# EAGLE board Iso_Spacer-Panel (EAGLE 9.5.2)
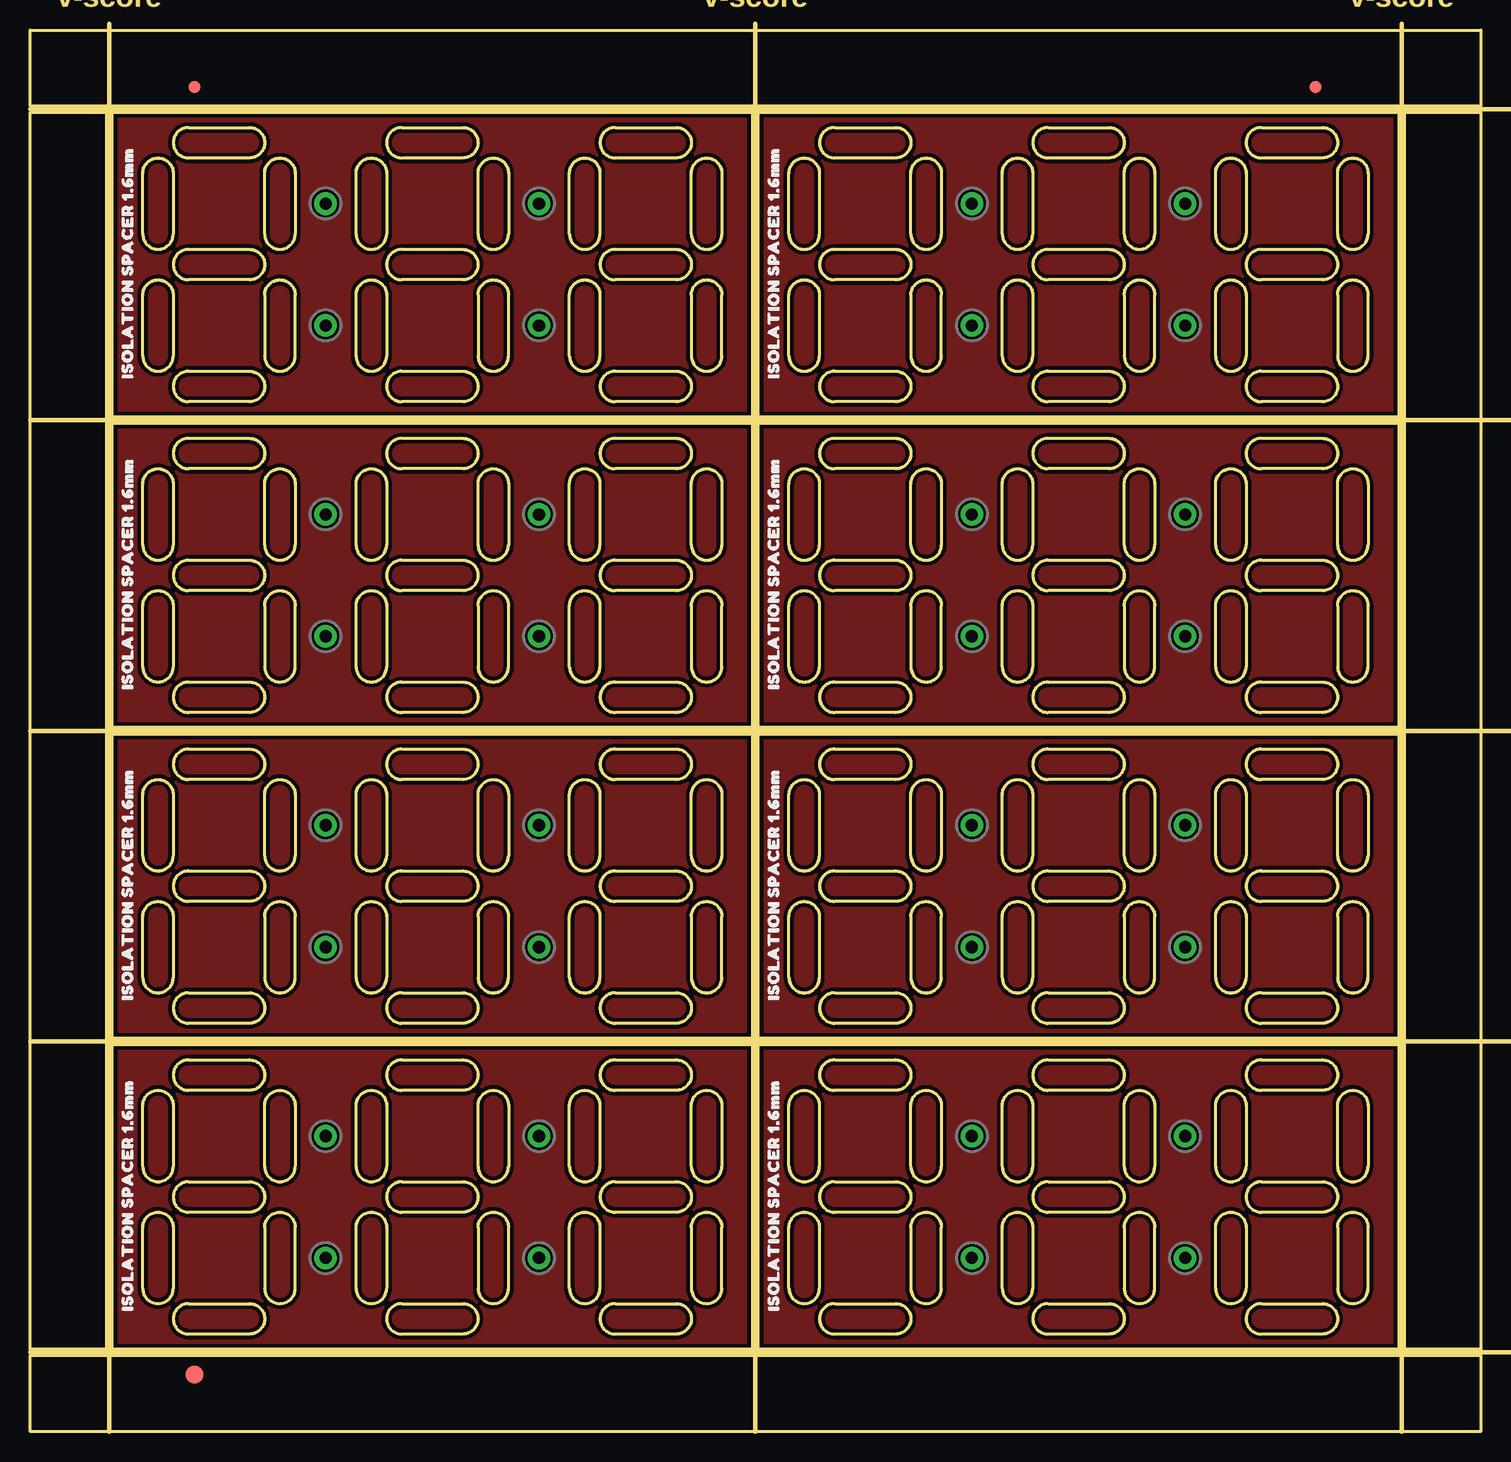
[diagram p0: board, top side]
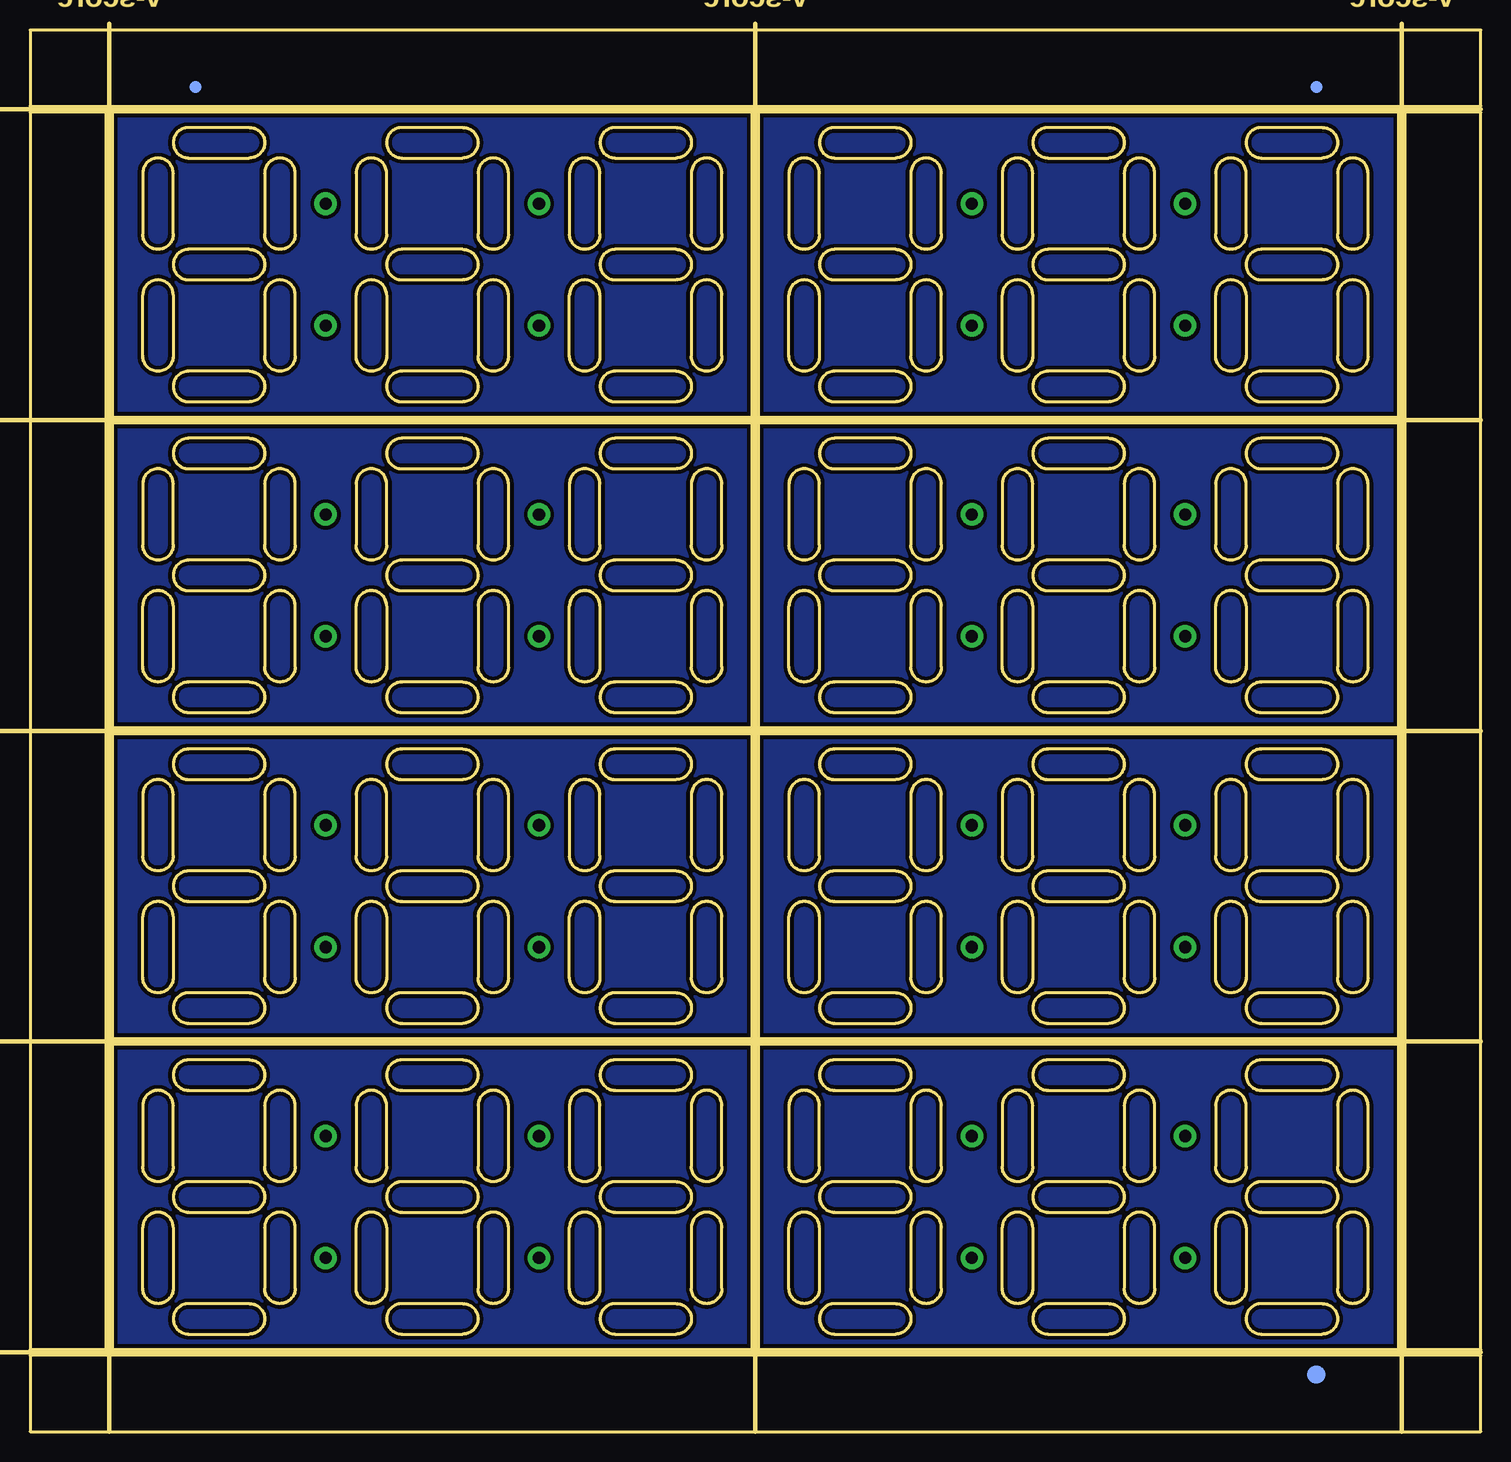
[diagram p1: board, bottom side, seen from below]

Size 120.9 x 116.84 mm. Coordinates in mm from the lower left corner, seen from the top.
Outline: 6.86,32.26 60.2,32.26 60.2,6.86 6.86,6.86 6.86,32.26
Outline: 13.21,30.99 18.29,30.99 arc-180 18.29,28.45 13.21,28.45 arc-180 13.21,30.99
Outline: 11.94,27.18 11.94,22.1 arc-180 9.4,22.1 9.4,27.18 arc-180 11.94,27.18
Outline: 22.1,27.18 22.1,22.1 arc-180 19.56,22.1 19.56,27.18 arc-180 22.1,27.18
Outline: 13.21,20.83 18.29,20.83 arc-180 18.29,18.29 13.21,18.29 arc-180 13.21,20.83
Outline: 11.94,17.02 11.94,11.94 arc-180 9.4,11.94 9.4,17.02 arc-180 11.94,17.02
Outline: 19.56,17.02 19.56,11.94 arc180 22.1,11.94 22.1,17.02 arc180 19.56,17.02
Outline: 13.21,10.67 18.29,10.67 arc-180 18.29,8.13 13.21,8.13 arc-180 13.21,10.67
Outline: 30.99,30.99 36.07,30.99 arc-180 36.07,28.45 30.99,28.45 arc-180 30.99,30.99
Outline: 29.72,27.18 29.72,22.1 arc-180 27.18,22.1 27.18,27.18 arc-180 29.72,27.18
Outline: 39.88,27.18 39.88,22.1 arc-180 37.34,22.1 37.34,27.18 arc-180 39.88,27.18
Outline: 30.99,20.83 36.07,20.83 arc-180 36.07,18.29 30.99,18.29 arc-180 30.99,20.83
Outline: 29.72,17.02 29.72,11.94 arc-180 27.18,11.94 27.18,17.02 arc-180 29.72,17.02
Outline: 37.34,17.02 37.34,11.94 arc180 39.88,11.94 39.88,17.02 arc180 37.34,17.02
Outline: 30.99,10.67 36.07,10.67 arc-180 36.07,8.13 30.99,8.13 arc-180 30.99,10.67
Outline: 48.77,30.99 53.85,30.99 arc-180 53.85,28.45 48.77,28.45 arc-180 48.77,30.99
Outline: 47.5,27.18 47.5,22.1 arc-180 44.96,22.1 44.96,27.18 arc-180 47.5,27.18
Outline: 57.66,27.18 57.66,22.1 arc-180 55.12,22.1 55.12,27.18 arc-180 57.66,27.18
Outline: 48.77,20.83 53.85,20.83 arc-180 53.85,18.29 48.77,18.29 arc-180 48.77,20.83
Outline: 47.5,17.02 47.5,11.94 arc-180 44.96,11.94 44.96,17.02 arc-180 47.5,17.02
Outline: 55.12,17.02 55.12,11.94 arc180 57.66,11.94 57.66,17.02 arc180 55.12,17.02
Outline: 48.77,10.67 53.85,10.67 arc-180 53.85,8.13 48.77,8.13 arc-180 48.77,10.67
Outline: 60.71,32.26 114.05,32.26 114.05,6.86 60.71,6.86 60.71,32.26
Outline: 67.06,30.99 72.14,30.99 arc-180 72.14,28.45 67.06,28.45 arc-180 67.06,30.99
Outline: 65.79,27.18 65.79,22.1 arc-180 63.25,22.1 63.25,27.18 arc-180 65.79,27.18
Outline: 75.95,27.18 75.95,22.1 arc-180 73.41,22.1 73.41,27.18 arc-180 75.95,27.18
Outline: 67.06,20.83 72.14,20.83 arc-180 72.14,18.29 67.06,18.29 arc-180 67.06,20.83
Outline: 65.79,17.02 65.79,11.94 arc-180 63.25,11.94 63.25,17.02 arc-180 65.79,17.02
Outline: 73.41,17.02 73.41,11.94 arc180 75.95,11.94 75.95,17.02 arc180 73.41,17.02
Outline: 67.06,10.67 72.14,10.67 arc-180 72.14,8.13 67.06,8.13 arc-180 67.06,10.67
Outline: 84.84,30.99 89.92,30.99 arc-180 89.92,28.45 84.84,28.45 arc-180 84.84,30.99
Outline: 83.57,27.18 83.57,22.1 arc-180 81.03,22.1 81.03,27.18 arc-180 83.57,27.18
Outline: 93.73,27.18 93.73,22.1 arc-180 91.19,22.1 91.19,27.18 arc-180 93.73,27.18
Outline: 84.84,20.83 89.92,20.83 arc-180 89.92,18.29 84.84,18.29 arc-180 84.84,20.83
Outline: 83.57,17.02 83.57,11.94 arc-180 81.03,11.94 81.03,17.02 arc-180 83.57,17.02
Outline: 91.19,17.02 91.19,11.94 arc180 93.73,11.94 93.73,17.02 arc180 91.19,17.02
Outline: 84.84,10.67 89.92,10.67 arc-180 89.92,8.13 84.84,8.13 arc-180 84.84,10.67
Outline: 102.62,30.99 107.7,30.99 arc-180 107.7,28.45 102.62,28.45 arc-180 102.62,30.99
Outline: 101.35,27.18 101.35,22.1 arc-180 98.81,22.1 98.81,27.18 arc-180 101.35,27.18
Outline: 111.51,27.18 111.51,22.1 arc-180 108.97,22.1 108.97,27.18 arc-180 111.51,27.18
Outline: 102.62,20.83 107.7,20.83 arc-180 107.7,18.29 102.62,18.29 arc-180 102.62,20.83
Outline: 101.35,17.02 101.35,11.94 arc-180 98.81,11.94 98.81,17.02 arc-180 101.35,17.02
Outline: 108.97,17.02 108.97,11.94 arc180 111.51,11.94 111.51,17.02 arc180 108.97,17.02
Outline: 102.62,10.67 107.7,10.67 arc-180 107.7,8.13 102.62,8.13 arc-180 102.62,10.67
Outline: 6.86,58.17 60.2,58.17 60.2,32.77 6.86,32.77 6.86,58.17
Outline: 13.21,56.9 18.29,56.9 arc-180 18.29,54.36 13.21,54.36 arc-180 13.21,56.9
Outline: 11.94,53.09 11.94,48.01 arc-180 9.4,48.01 9.4,53.09 arc-180 11.94,53.09
Outline: 22.1,53.09 22.1,48.01 arc-180 19.56,48.01 19.56,53.09 arc-180 22.1,53.09
Outline: 13.21,46.74 18.29,46.74 arc-180 18.29,44.2 13.21,44.2 arc-180 13.21,46.74
Outline: 11.94,42.93 11.94,37.85 arc-180 9.4,37.85 9.4,42.93 arc-180 11.94,42.93
Outline: 19.56,42.93 19.56,37.85 arc180 22.1,37.85 22.1,42.93 arc180 19.56,42.93
Outline: 13.21,36.58 18.29,36.58 arc-180 18.29,34.04 13.21,34.04 arc-180 13.21,36.58
Outline: 30.99,56.9 36.07,56.9 arc-180 36.07,54.36 30.99,54.36 arc-180 30.99,56.9
Outline: 29.72,53.09 29.72,48.01 arc-180 27.18,48.01 27.18,53.09 arc-180 29.72,53.09
Outline: 39.88,53.09 39.88,48.01 arc-180 37.34,48.01 37.34,53.09 arc-180 39.88,53.09
Outline: 30.99,46.74 36.07,46.74 arc-180 36.07,44.2 30.99,44.2 arc-180 30.99,46.74
Outline: 29.72,42.93 29.72,37.85 arc-180 27.18,37.85 27.18,42.93 arc-180 29.72,42.93
Outline: 37.34,42.93 37.34,37.85 arc180 39.88,37.85 39.88,42.93 arc180 37.34,42.93
Outline: 30.99,36.58 36.07,36.58 arc-180 36.07,34.04 30.99,34.04 arc-180 30.99,36.58
Outline: 48.77,56.9 53.85,56.9 arc-180 53.85,54.36 48.77,54.36 arc-180 48.77,56.9
Outline: 47.5,53.09 47.5,48.01 arc-180 44.96,48.01 44.96,53.09 arc-180 47.5,53.09
Outline: 57.66,53.09 57.66,48.01 arc-180 55.12,48.01 55.12,53.09 arc-180 57.66,53.09
Outline: 48.77,46.74 53.85,46.74 arc-180 53.85,44.2 48.77,44.2 arc-180 48.77,46.74
Outline: 47.5,42.93 47.5,37.85 arc-180 44.96,37.85 44.96,42.93 arc-180 47.5,42.93
Outline: 55.12,42.93 55.12,37.85 arc180 57.66,37.85 57.66,42.93 arc180 55.12,42.93
Outline: 48.77,36.58 53.85,36.58 arc-180 53.85,34.04 48.77,34.04 arc-180 48.77,36.58
Outline: 60.71,58.17 114.05,58.17 114.05,32.77 60.71,32.77 60.71,58.17
Outline: 67.06,56.9 72.14,56.9 arc-180 72.14,54.36 67.06,54.36 arc-180 67.06,56.9
Outline: 65.79,53.09 65.79,48.01 arc-180 63.25,48.01 63.25,53.09 arc-180 65.79,53.09
Outline: 75.95,53.09 75.95,48.01 arc-180 73.41,48.01 73.41,53.09 arc-180 75.95,53.09
Outline: 67.06,46.74 72.14,46.74 arc-180 72.14,44.2 67.06,44.2 arc-180 67.06,46.74
Outline: 65.79,42.93 65.79,37.85 arc-180 63.25,37.85 63.25,42.93 arc-180 65.79,42.93
Outline: 73.41,42.93 73.41,37.85 arc180 75.95,37.85 75.95,42.93 arc180 73.41,42.93
Outline: 67.06,36.58 72.14,36.58 arc-180 72.14,34.04 67.06,34.04 arc-180 67.06,36.58
Outline: 84.84,56.9 89.92,56.9 arc-180 89.92,54.36 84.84,54.36 arc-180 84.84,56.9
Outline: 83.57,53.09 83.57,48.01 arc-180 81.03,48.01 81.03,53.09 arc-180 83.57,53.09
Outline: 93.73,53.09 93.73,48.01 arc-180 91.19,48.01 91.19,53.09 arc-180 93.73,53.09
Outline: 84.84,46.74 89.92,46.74 arc-180 89.92,44.2 84.84,44.2 arc-180 84.84,46.74
Outline: 83.57,42.93 83.57,37.85 arc-180 81.03,37.85 81.03,42.93 arc-180 83.57,42.93
Outline: 91.19,42.93 91.19,37.85 arc180 93.73,37.85 93.73,42.93 arc180 91.19,42.93
Outline: 84.84,36.58 89.92,36.58 arc-180 89.92,34.04 84.84,34.04 arc-180 84.84,36.58
Outline: 102.62,56.9 107.7,56.9 arc-180 107.7,54.36 102.62,54.36 arc-180 102.62,56.9
Outline: 101.35,53.09 101.35,48.01 arc-180 98.81,48.01 98.81,53.09 arc-180 101.35,53.09
Outline: 111.51,53.09 111.51,48.01 arc-180 108.97,48.01 108.97,53.09 arc-180 111.51,53.09
Outline: 102.62,46.74 107.7,46.74 arc-180 107.7,44.2 102.62,44.2 arc-180 102.62,46.74
Outline: 101.35,42.93 101.35,37.85 arc-180 98.81,37.85 98.81,42.93 arc-180 101.35,42.93
Outline: 108.97,42.93 108.97,37.85 arc180 111.51,37.85 111.51,42.93 arc180 108.97,42.93
Outline: 102.62,36.58 107.7,36.58 arc-180 107.7,34.04 102.62,34.04 arc-180 102.62,36.58
Outline: 6.86,84.07 60.2,84.07 60.2,58.67 6.86,58.67 6.86,84.07
Outline: 13.21,82.8 18.29,82.8 arc-180 18.29,80.26 13.21,80.26 arc-180 13.21,82.8
Outline: 11.94,78.99 11.94,73.91 arc-180 9.4,73.91 9.4,78.99 arc-180 11.94,78.99
Outline: 22.1,78.99 22.1,73.91 arc-180 19.56,73.91 19.56,78.99 arc-180 22.1,78.99
Outline: 13.21,72.64 18.29,72.64 arc-180 18.29,70.1 13.21,70.1 arc-180 13.21,72.64
Outline: 11.94,68.83 11.94,63.75 arc-180 9.4,63.75 9.4,68.83 arc-180 11.94,68.83
Outline: 19.56,68.83 19.56,63.75 arc180 22.1,63.75 22.1,68.83 arc180 19.56,68.83
Outline: 13.21,62.48 18.29,62.48 arc-180 18.29,59.94 13.21,59.94 arc-180 13.21,62.48
Outline: 30.99,82.8 36.07,82.8 arc-180 36.07,80.26 30.99,80.26 arc-180 30.99,82.8
Outline: 29.72,78.99 29.72,73.91 arc-180 27.18,73.91 27.18,78.99 arc-180 29.72,78.99
Outline: 39.88,78.99 39.88,73.91 arc-180 37.34,73.91 37.34,78.99 arc-180 39.88,78.99
Outline: 30.99,72.64 36.07,72.64 arc-180 36.07,70.1 30.99,70.1 arc-180 30.99,72.64
Outline: 29.72,68.83 29.72,63.75 arc-180 27.18,63.75 27.18,68.83 arc-180 29.72,68.83
Outline: 37.34,68.83 37.34,63.75 arc180 39.88,63.75 39.88,68.83 arc180 37.34,68.83
Outline: 30.99,62.48 36.07,62.48 arc-180 36.07,59.94 30.99,59.94 arc-180 30.99,62.48
Outline: 48.77,82.8 53.85,82.8 arc-180 53.85,80.26 48.77,80.26 arc-180 48.77,82.8
Outline: 47.5,78.99 47.5,73.91 arc-180 44.96,73.91 44.96,78.99 arc-180 47.5,78.99
Outline: 57.66,78.99 57.66,73.91 arc-180 55.12,73.91 55.12,78.99 arc-180 57.66,78.99
Outline: 48.77,72.64 53.85,72.64 arc-180 53.85,70.1 48.77,70.1 arc-180 48.77,72.64
Outline: 47.5,68.83 47.5,63.75 arc-180 44.96,63.75 44.96,68.83 arc-180 47.5,68.83
Outline: 55.12,68.83 55.12,63.75 arc180 57.66,63.75 57.66,68.83 arc180 55.12,68.83
Outline: 48.77,62.48 53.85,62.48 arc-180 53.85,59.94 48.77,59.94 arc-180 48.77,62.48
Outline: 60.71,84.07 114.05,84.07 114.05,58.67 60.71,58.67 60.71,84.07
Outline: 67.06,82.8 72.14,82.8 arc-180 72.14,80.26 67.06,80.26 arc-180 67.06,82.8
Outline: 65.79,78.99 65.79,73.91 arc-180 63.25,73.91 63.25,78.99 arc-180 65.79,78.99
Outline: 75.95,78.99 75.95,73.91 arc-180 73.41,73.91 73.41,78.99 arc-180 75.95,78.99
Outline: 67.06,72.64 72.14,72.64 arc-180 72.14,70.1 67.06,70.1 arc-180 67.06,72.64
Outline: 65.79,68.83 65.79,63.75 arc-180 63.25,63.75 63.25,68.83 arc-180 65.79,68.83
Outline: 73.41,68.83 73.41,63.75 arc180 75.95,63.75 75.95,68.83 arc180 73.41,68.83
Outline: 67.06,62.48 72.14,62.48 arc-180 72.14,59.94 67.06,59.94 arc-180 67.06,62.48
Outline: 84.84,82.8 89.92,82.8 arc-180 89.92,80.26 84.84,80.26 arc-180 84.84,82.8
Outline: 83.57,78.99 83.57,73.91 arc-180 81.03,73.91 81.03,78.99 arc-180 83.57,78.99
Outline: 93.73,78.99 93.73,73.91 arc-180 91.19,73.91 91.19,78.99 arc-180 93.73,78.99
Outline: 84.84,72.64 89.92,72.64 arc-180 89.92,70.1 84.84,70.1 arc-180 84.84,72.64
Outline: 83.57,68.83 83.57,63.75 arc-180 81.03,63.75 81.03,68.83 arc-180 83.57,68.83
Outline: 91.19,68.83 91.19,63.75 arc180 93.73,63.75 93.73,68.83 arc180 91.19,68.83
Outline: 84.84,62.48 89.92,62.48 arc-180 89.92,59.94 84.84,59.94 arc-180 84.84,62.48
Outline: 102.62,82.8 107.7,82.8 arc-180 107.7,80.26 102.62,80.26 arc-180 102.62,82.8
Outline: 101.35,78.99 101.35,73.91 arc-180 98.81,73.91 98.81,78.99 arc-180 101.35,78.99
Outline: 111.51,78.99 111.51,73.91 arc-180 108.97,73.91 108.97,78.99 arc-180 111.51,78.99
Outline: 102.62,72.64 107.7,72.64 arc-180 107.7,70.1 102.62,70.1 arc-180 102.62,72.64
Outline: 101.35,68.83 101.35,63.75 arc-180 98.81,63.75 98.81,68.83 arc-180 101.35,68.83
Outline: 108.97,68.83 108.97,63.75 arc180 111.51,63.75 111.51,68.83 arc180 108.97,68.83
Outline: 102.62,62.48 107.7,62.48 arc-180 107.7,59.94 102.62,59.94 arc-180 102.62,62.48
Outline: 6.86,109.98 60.2,109.98 60.2,84.58 6.86,84.58 6.86,109.98
Outline: 13.21,108.71 18.29,108.71 arc-180 18.29,106.17 13.21,106.17 arc-180 13.21,108.71
Outline: 11.94,104.9 11.94,99.82 arc-180 9.4,99.82 9.4,104.9 arc-180 11.94,104.9
Outline: 22.1,104.9 22.1,99.82 arc-180 19.56,99.82 19.56,104.9 arc-180 22.1,104.9
Outline: 13.21,98.55 18.29,98.55 arc-180 18.29,96.01 13.21,96.01 arc-180 13.21,98.55
Outline: 11.94,94.74 11.94,89.66 arc-180 9.4,89.66 9.4,94.74 arc-180 11.94,94.74
Outline: 19.56,94.74 19.56,89.66 arc180 22.1,89.66 22.1,94.74 arc180 19.56,94.74
Outline: 13.21,88.39 18.29,88.39 arc-180 18.29,85.85 13.21,85.85 arc-180 13.21,88.39
Outline: 30.99,108.71 36.07,108.71 arc-180 36.07,106.17 30.99,106.17 arc-180 30.99,108.71
Outline: 29.72,104.9 29.72,99.82 arc-180 27.18,99.82 27.18,104.9 arc-180 29.72,104.9
Outline: 39.88,104.9 39.88,99.82 arc-180 37.34,99.82 37.34,104.9 arc-180 39.88,104.9
Outline: 30.99,98.55 36.07,98.55 arc-180 36.07,96.01 30.99,96.01 arc-180 30.99,98.55
Outline: 29.72,94.74 29.72,89.66 arc-180 27.18,89.66 27.18,94.74 arc-180 29.72,94.74
Outline: 37.34,94.74 37.34,89.66 arc180 39.88,89.66 39.88,94.74 arc180 37.34,94.74
Outline: 30.99,88.39 36.07,88.39 arc-180 36.07,85.85 30.99,85.85 arc-180 30.99,88.39
Outline: 48.77,108.71 53.85,108.71 arc-180 53.85,106.17 48.77,106.17 arc-180 48.77,108.71
Outline: 47.5,104.9 47.5,99.82 arc-180 44.96,99.82 44.96,104.9 arc-180 47.5,104.9
Outline: 57.66,104.9 57.66,99.82 arc-180 55.12,99.82 55.12,104.9 arc-180 57.66,104.9
Outline: 48.77,98.55 53.85,98.55 arc-180 53.85,96.01 48.77,96.01 arc-180 48.77,98.55
Outline: 47.5,94.74 47.5,89.66 arc-180 44.96,89.66 44.96,94.74 arc-180 47.5,94.74
Outline: 55.12,94.74 55.12,89.66 arc180 57.66,89.66 57.66,94.74 arc180 55.12,94.74
Outline: 48.77,88.39 53.85,88.39 arc-180 53.85,85.85 48.77,85.85 arc-180 48.77,88.39
Outline: 60.71,109.98 114.05,109.98 114.05,84.58 60.71,84.58 60.71,109.98
Outline: 67.06,108.71 72.14,108.71 arc-180 72.14,106.17 67.06,106.17 arc-180 67.06,108.71
Outline: 65.79,104.9 65.79,99.82 arc-180 63.25,99.82 63.25,104.9 arc-180 65.79,104.9
Outline: 75.95,104.9 75.95,99.82 arc-180 73.41,99.82 73.41,104.9 arc-180 75.95,104.9
Outline: 67.06,98.55 72.14,98.55 arc-180 72.14,96.01 67.06,96.01 arc-180 67.06,98.55
Outline: 65.79,94.74 65.79,89.66 arc-180 63.25,89.66 63.25,94.74 arc-180 65.79,94.74
Outline: 73.41,94.74 73.41,89.66 arc180 75.95,89.66 75.95,94.74 arc180 73.41,94.74
Outline: 67.06,88.39 72.14,88.39 arc-180 72.14,85.85 67.06,85.85 arc-180 67.06,88.39
Outline: 84.84,108.71 89.92,108.71 arc-180 89.92,106.17 84.84,106.17 arc-180 84.84,108.71
Outline: 83.57,104.9 83.57,99.82 arc-180 81.03,99.82 81.03,104.9 arc-180 83.57,104.9
Outline: 93.73,104.9 93.73,99.82 arc-180 91.19,99.82 91.19,104.9 arc-180 93.73,104.9
Outline: 84.84,98.55 89.92,98.55 arc-180 89.92,96.01 84.84,96.01 arc-180 84.84,98.55
Outline: 83.57,94.74 83.57,89.66 arc-180 81.03,89.66 81.03,94.74 arc-180 83.57,94.74
Outline: 91.19,94.74 91.19,89.66 arc180 93.73,89.66 93.73,94.74 arc180 91.19,94.74
Outline: 84.84,88.39 89.92,88.39 arc-180 89.92,85.85 84.84,85.85 arc-180 84.84,88.39
Outline: 102.62,108.71 107.7,108.71 arc-180 107.7,106.17 102.62,106.17 arc-180 102.62,108.71
Outline: 101.35,104.9 101.35,99.82 arc-180 98.81,99.82 98.81,104.9 arc-180 101.35,104.9
Outline: 111.51,104.9 111.51,99.82 arc-180 108.97,99.82 108.97,104.9 arc-180 111.51,104.9
Outline: 102.62,98.55 107.7,98.55 arc-180 107.7,96.01 102.62,96.01 arc-180 102.62,98.55
Outline: 101.35,94.74 101.35,89.66 arc-180 98.81,89.66 98.81,94.74 arc-180 101.35,94.74
Outline: 108.97,94.74 108.97,89.66 arc180 111.51,89.66 111.51,94.74 arc180 108.97,94.74
Outline: 102.62,88.39 107.7,88.39 arc-180 107.7,85.85 102.62,85.85 arc-180 102.62,88.39
Outline: 0,6.35 120.9,6.35 120.9,0 0,0 0,6.35
Outline: 114.55,109.98 120.9,109.98 120.9,6.86 114.55,6.86 114.55,109.98
Outline: 0,116.84 120.9,116.84 120.9,110.49 0,110.49 0,116.84
Outline: 0,109.98 6.35,109.98 6.35,6.86 0,6.86 0,109.98
Copper layers (1*16): Top 0.035mm / dielectric 1.5mm / Bottom 0.035mm
Design rules "Iso_Spacer": minimum track width 5mil, minimum drill 0.3mm, track to track 5mil, track to pad 5mil, pad to pad 5mil, via to via 5mil, smd to smd 5mil, copper to edge 7mil, drill to drill 7mil, minimum pad ring 5mil, minimum via ring 5mil, stop-mask expansion 4mil, vias tented up to drill 25mil, thermal gap 10mil
Milling: 8 lines

## Footprints (pad centres in the part's own frame; a part is rotated, then mirrored left to right if it is on the bottom)
FIDUCIAL-1X2 = smd 1 x 1: 1 0,0
FIDUCIAL-1.5X3 = smd 1.5 x 1.5: 1 0,0

## Placement (x,y rotation side)
E$1  [ISOLATION_SPACER_1#6MM0]  61.98,9.4 90 top
E$2  [ISOLATION_SPACER_1#6MM0]  8.13,35.31 90 top
E$3  [ISOLATION_SPACER_1#6MM0]  61.98,35.31 90 top
E$4  [ISOLATION_SPACER_1#6MM0]  8.13,9.4 90 top
E$5  [ISOLATION_SPACER_1#6MM0]  8.13,61.21 90 top
E$6  [ISOLATION_SPACER_1#6MM0]  61.98,61.21 90 top
E$7  [ISOLATION_SPACER_1#6MM0]  8.13,87.12 90 top
E$8  [ISOLATION_SPACER_1#6MM0]  61.98,87.12 90 top
E$9  [FIDUCIAL-1X2]  13.72,112.08 0 top
E$10  [FIDUCIAL-1X2]  13.72,112.08 0 bottom
E$11  [FIDUCIAL-1X2]  107.12,112.08 0 top
E$12  [FIDUCIAL-1X2]  107.12,112.08 0 bottom
E$13  [FIDUCIAL-1.5X3]  13.72,4.76 0 top
E$14  [FIDUCIAL-1.5X3]  13.72,4.76 0 bottom

## Library data of the parts
E$1-E$8 = output
E$9-E$12 = SparkFun-Aesthetics
E$13 E$14 = SparkFun-Retired

## Tracks (layer width: path | path; a pad name or v marks a point on that pad's centre or on a via)
GND
  pour Top (isolate 0.305): 6.86,32.26 60.2,32.26 60.2,6.86 6.86,6.86
  pour Bottom (isolate 0.305): 6.86,32.26 60.2,32.26 60.2,6.86 6.86,6.86
GND1
  pour Top (isolate 0.305): 60.71,32.26 114.05,32.26 114.05,6.86 60.71,6.86
  pour Bottom (isolate 0.305): 60.71,32.26 114.05,32.26 114.05,6.86 60.71,6.86
GND2
  pour Top (isolate 0.305): 6.86,58.17 60.2,58.17 60.2,32.77 6.86,32.77
  pour Bottom (isolate 0.305): 6.86,58.17 60.2,58.17 60.2,32.77 6.86,32.77
GND3
  pour Top (isolate 0.305): 60.71,58.17 114.05,58.17 114.05,32.77 60.71,32.77
  pour Bottom (isolate 0.305): 60.71,58.17 114.05,58.17 114.05,32.77 60.71,32.77
GND4
  pour Top (isolate 0.305): 6.86,84.07 60.2,84.07 60.2,58.67 6.86,58.67
  pour Bottom (isolate 0.305): 6.86,84.07 60.2,84.07 60.2,58.67 6.86,58.67
GND5
  pour Top (isolate 0.305): 60.71,84.07 114.05,84.07 114.05,58.67 60.71,58.67
  pour Bottom (isolate 0.305): 60.71,84.07 114.05,84.07 114.05,58.67 60.71,58.67
GND6
  pour Top (isolate 0.305): 6.86,109.98 60.2,109.98 60.2,84.58 6.86,84.58
  pour Bottom (isolate 0.305): 6.86,109.98 60.2,109.98 60.2,84.58 6.86,84.58
GND7
  pour Top (isolate 0.305): 60.71,109.98 114.05,109.98 114.05,84.58 60.71,84.58
  pour Bottom (isolate 0.305): 60.71,109.98 114.05,109.98 114.05,84.58 60.71,84.58
N$1  (via drill 1.02 pad 1.88)
  other vias: 96.27,14.48
N$2  (via drill 1.02 pad 1.88)
  other vias: 96.27,24.64
N$3  (via drill 1.02 pad 1.88)
  other vias: 78.49,24.64
N$4  (via drill 1.02 pad 1.88)
  other vias: 78.49,14.48
N$5  (via drill 1.02 pad 1.88)
  other vias: 42.42,40.39
N$6  (via drill 1.02 pad 1.88)
  other vias: 42.42,50.55
N$7  (via drill 1.02 pad 1.88)
  other vias: 24.64,50.55
N$8  (via drill 1.02 pad 1.88)
  other vias: 24.64,40.39
N$9  (via drill 1.02 pad 1.88)
  other vias: 96.27,40.39
N$10  (via drill 1.02 pad 1.88)
  other vias: 96.27,50.55
N$11  (via drill 1.02 pad 1.88)
  other vias: 78.49,50.55
N$12  (via drill 1.02 pad 1.88)
  other vias: 78.49,40.39
N$13  (via drill 1.02 pad 1.88)
  other vias: 42.42,66.29
N$14  (via drill 1.02 pad 1.88)
  other vias: 42.42,76.45
N$15  (via drill 1.02 pad 1.88)
  other vias: 24.64,76.45
N$16  (via drill 1.02 pad 1.88)
  other vias: 24.64,66.29
N$17  (via drill 1.02 pad 1.88)
  other vias: 96.27,66.29
N$18  (via drill 1.02 pad 1.88)
  other vias: 96.27,76.45
N$19  (via drill 1.02 pad 1.88)
  other vias: 78.49,76.45
N$20  (via drill 1.02 pad 1.88)
  other vias: 78.49,66.29
N$21  (via drill 1.02 pad 1.88)
  other vias: 42.42,92.2
N$22  (via drill 1.02 pad 1.88)
  other vias: 42.42,102.36
N$23  (via drill 1.02 pad 1.88)
  other vias: 24.64,102.36
N$24  (via drill 1.02 pad 1.88)
  other vias: 24.64,92.2
N$25  (via drill 1.02 pad 1.88)
  other vias: 96.27,92.2
N$26  (via drill 1.02 pad 1.88)
  other vias: 96.27,102.36
N$27  (via drill 1.02 pad 1.88)
  other vias: 78.49,102.36
N$28  (via drill 1.02 pad 1.88)
  other vias: 78.49,92.2
N$52  (via drill 1.02 pad 1.88)
  other vias: 42.42,14.48
N$53  (via drill 1.02 pad 1.88)
  other vias: 42.42,24.64
N$54  (via drill 1.02 pad 1.88)
  other vias: 24.64,24.64
N$55  (via drill 1.02 pad 1.88)
  other vias: 24.64,14.48

## Text on the board
Milling: v-score | v-score | v-score | v-score | v-score | v-score | v-score | v-score